# Altium PCB PCB1.PcbDoc
Units mm, origin at the board's own origin, x right, y up, seen from the top; angles counter-clockwise.
Board outline 130 x 120 mm, 2 copper layers (Top Layer, Bottom Layer); 23 components, 21 nets, 144 pads, 4 vias.
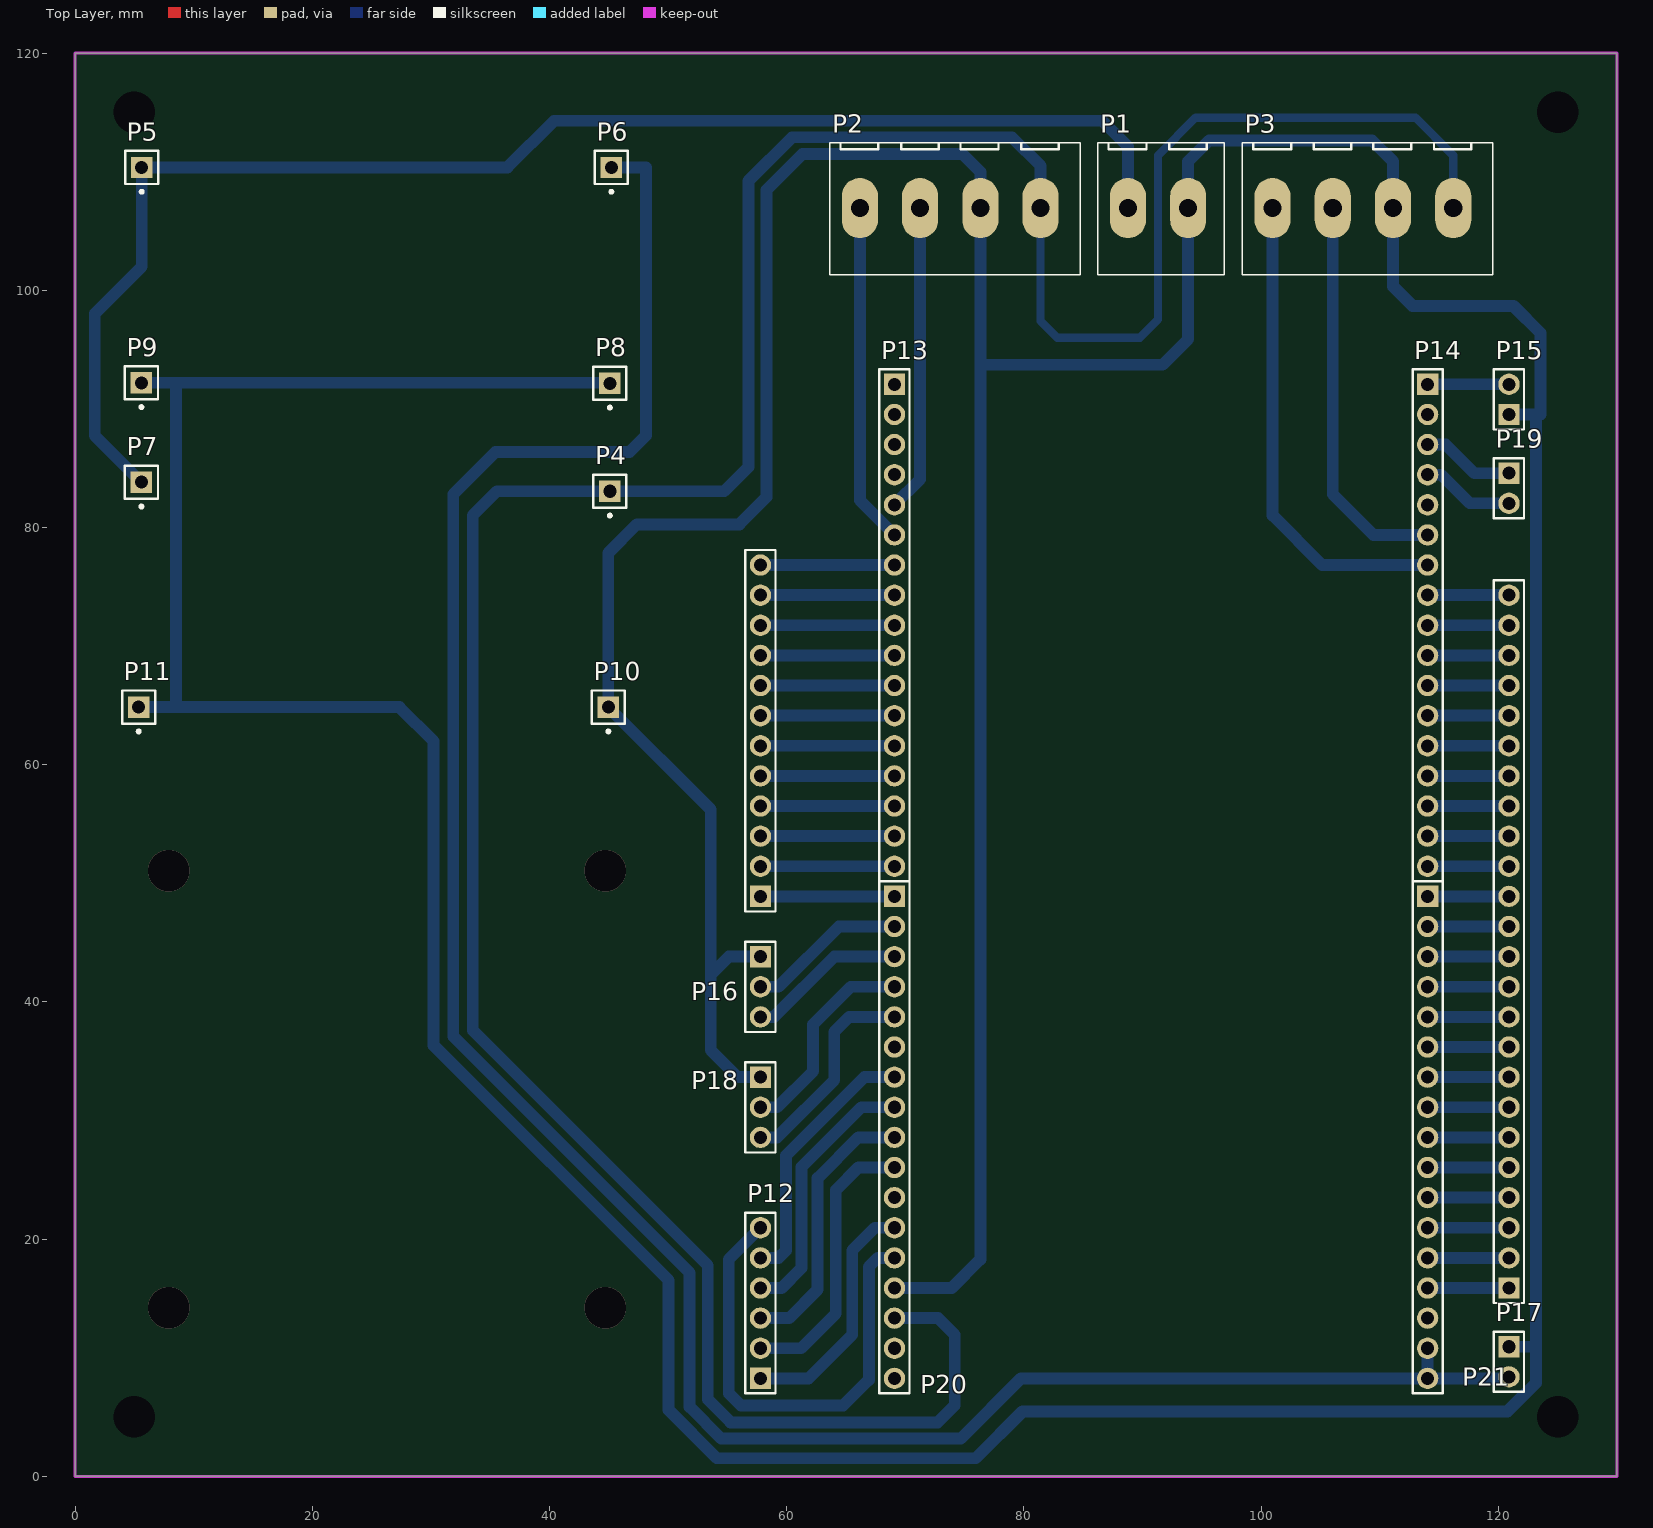
[diagram p0: Top Layer view]
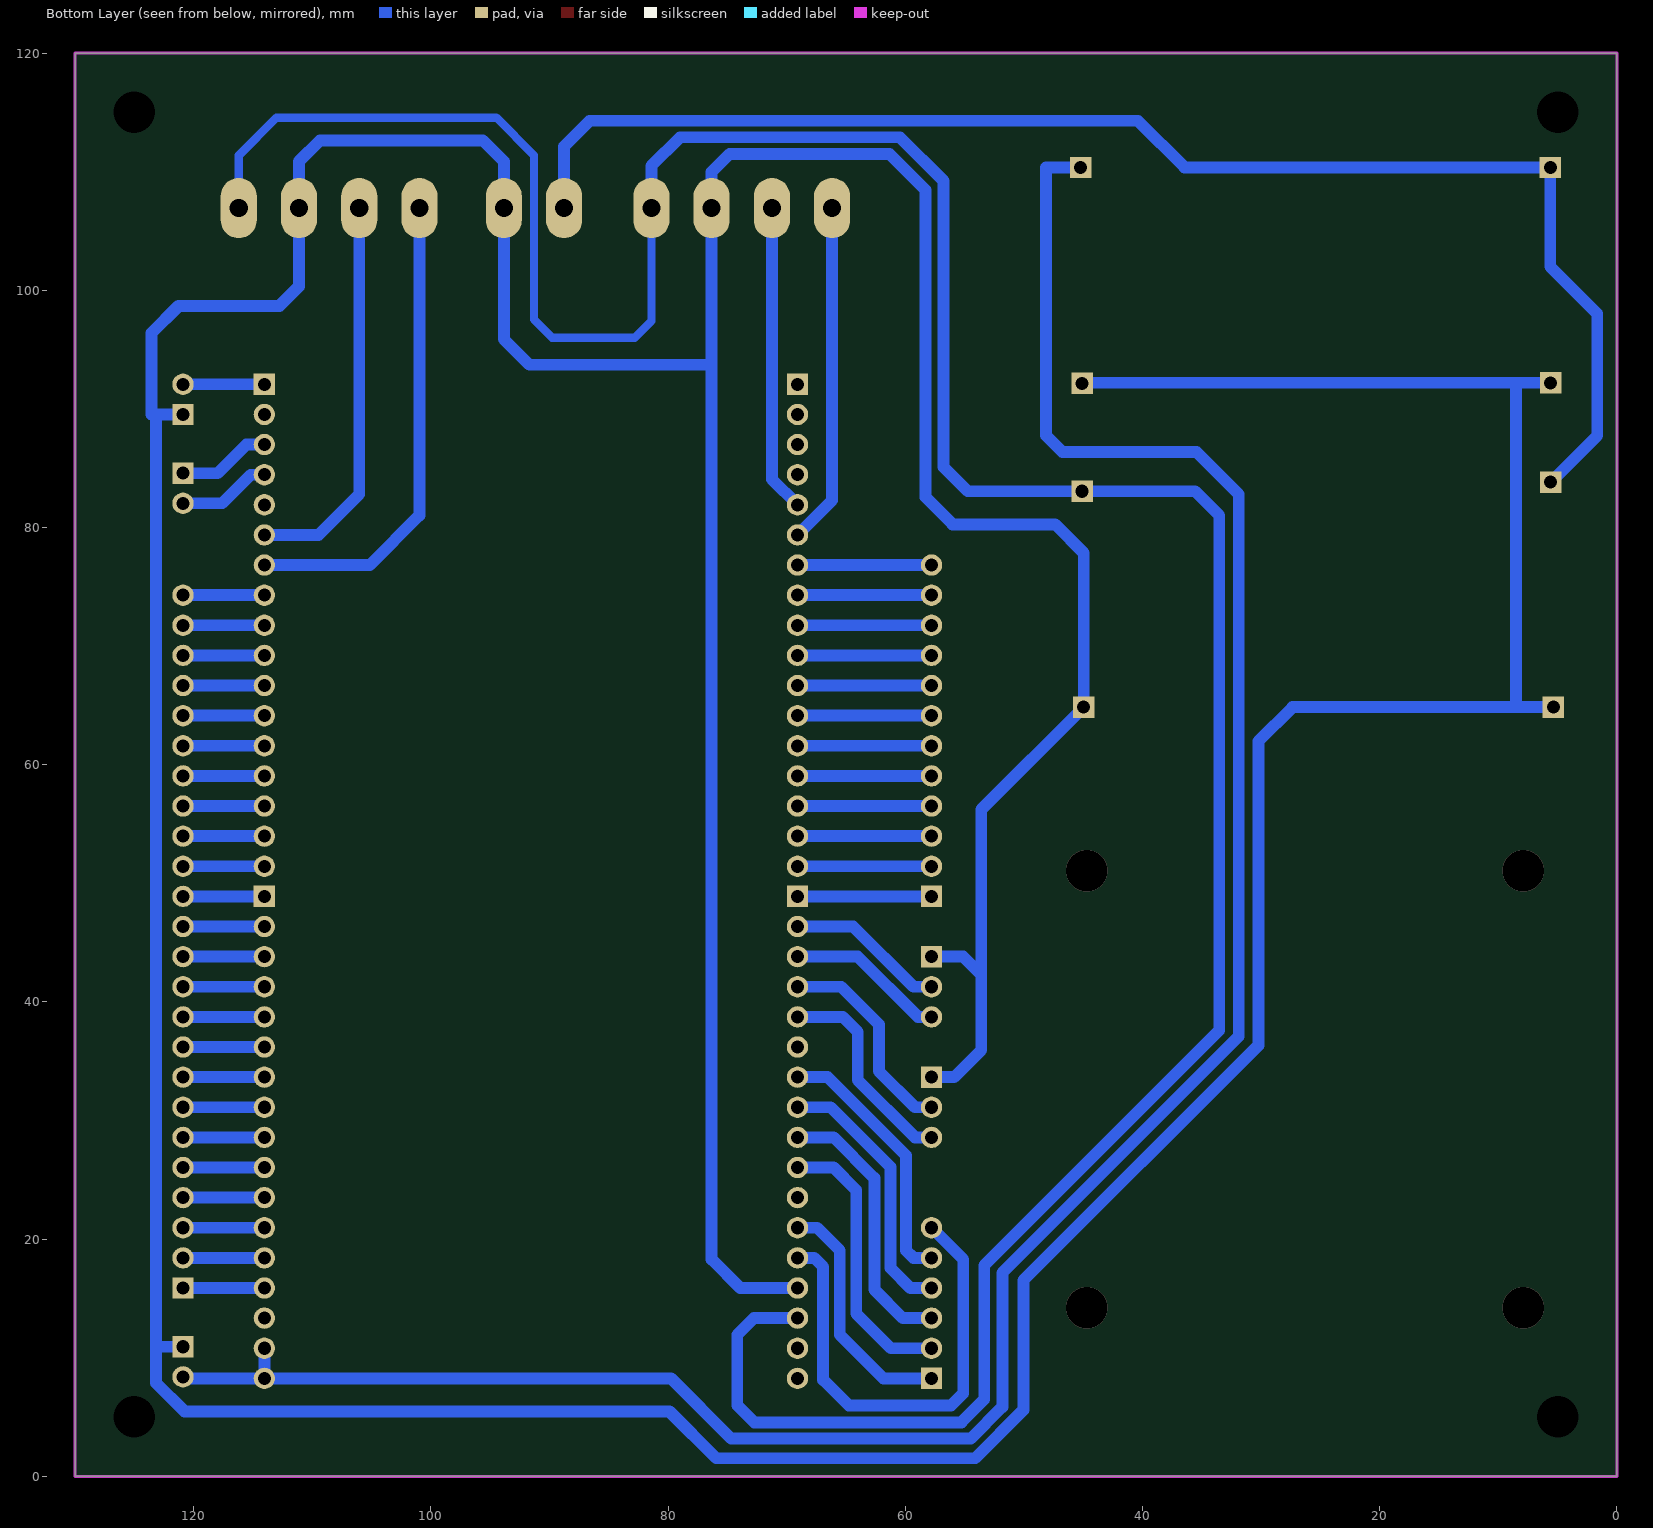
[diagram p1: Bottom Layer view, seen from below]

## Layer stack, top to bottom
Top Solder: solder mask 0.0102, Solder Resist, Dk 3.5
Top Layer: signal copper 0.0356
Dielectric 1: dielectric 0.32, FR-4, Dk 4.8
Bottom Layer: signal copper 0.0356
Bottom Solder: solder mask 0.0102, Solder Resist, Dk 3.5

## Board outline
0,0 0,120 130,120 130,0

## Design rules (kind name [scope] priority, off if disabled: settings)
Clearance [All] p1: gap=0.254 except(0.3: Track-Track)
PolygonConnect [All] p1: connectstyle=Relief reliefconductorwidth=0.254 reliefentries=4 polygonreliefangle="90 Angle" airgapwidth=0.254
RoutingVias [All] p1: holewidth=0.3 width=0.6 viastyle="Through Hole" minholewidth=0.1 minwidth=0.1 maxholewidth=1 maxwidth=2
SolderMaskExpansion [All] p1: expansion=0.102
Width [All] p1: maxlimit=2 minlimit=0.1 preferedwidth=0.8
30 further rules are at their usual default settings.

## Classes and differential pairs
component class Sheet: P1 P2 P3 P4 P5 P6 P7 P8 P9 P10 P11 P12 P13 P14 P15 P16 P17 P18 P19 P20 P21

## Components (designator, comment, footprint, x,y, rotation, side; value= is the part's Value field where it differs from the comment)
P1 "PHOENIX2" PHOENIX-MKDS2 91.313,106.934 r0 top
P2 "PHOENIX4" PHOENIX-MKDS4 73.787,106.934 r0 top
P3 "PHOENIX4" PHOENIX-MKDS4 108.585,106.934 r0 top
P4 "Plug" PIN1 45.085,83.058 r180 top
P5 "Plug" PIN1 5.612,110.363 r180 top
P6 "Plug" PIN1 45.212,110.363 r180 top
P7 "Plug" PIN1 5.588,83.82 r180 top
P8 "Plug" PIN1 45.085,92.163 r180 top
P9 "Plug" PIN1 5.588,92.202 r180 top
P10 "Plug" PIN1 44.958,64.858 r180 top
P11 "Plug" PIN1 5.358,64.858 r180 top
P12 "Driver" HDR1X6 57.785,8.255 r90 top
P13 "Header 17" HDR1X17 69.088,92.075 r270 top
P14 "Header 17" HDR1X17 114.046,92.075 r270 top
P15 "3V3" HDR1X2 120.904,89.535 r90 top
P16 "USART4" HDR1X3 57.785,43.815 r270 top
P17 "5V" HDR1X2 120.904,10.922 r270 top
P18 "USART5" HDR1X3 57.785,33.655 r270 top
P19 "I2C" HDR1X2 120.904,84.582 r270 top
P20 "Header 17" HDR1X17 69.088,48.895 r270 top
P21 "Header 17" HDR1X17 114.046,48.895 r270 top
? "Comment" HDR1X24 120.904,15.875 r90 top
? "Comment" HDR1X12 57.785,48.895 r90 top

## Footprints (in the part's own frame and the unit in brackets; to place one, negate y for a bottom-side part, rotate by r counter-clockwise, add the part's x,y. Pads: shape width x height; smd on the part's side, far side on the other; paste and mask are expansions set on the pad)
HDR1X2 [mm] "Connector; Header; 2 Position"
  rect 1.8x1.8 hole 1.1: 1(0,0)
  round 1.8 hole 1.1: 2(2.54,0)
  silkscreen extent -1.27,-1.27 3.81,1.27
HDR1X3 [mm] "Connector; Header; 3 Position"
  rect 1.8x1.8 hole 1.1: 1(0,0)
  round 1.8 hole 1.1: 2(2.54,0) 3(5.08,0)
  silkscreen extent -1.27,-1.27 6.35,1.27
HDR1X6 [mm] "Connector; Header; 6 Position"
  rect 1.8x1.8 hole 1.1: 1(0,0)
  round 1.8 hole 1.1: 2(2.54,0) 3(5.08,0) 4(7.62,0) 5(10.16,0) 6(12.7,0)
  silkscreen extent -1.27,-1.27 13.97,1.27
HDR1X12 [mm] "Connector; Header; 12 Position"
  rect 1.8x1.8 hole 1.1: 1(0,0)
  round 1.8 hole 1.1: 2(2.54,0) 3(5.08,0) 4(7.62,0) 5(10.16,0) 6(12.7,0) 7(15.24,0) 8(17.78,0) 9(20.32,0) 10(22.86,0) 11(25.4,0) 12(27.94,0)
  silkscreen extent -1.27,-1.27 29.21,1.27
HDR1X17 [mm] "Connector; Header; 17 Position"
  rect 1.8x1.8 hole 1.1: 1(0,0)
  round 1.8 hole 1.1: 2(2.54,0) 3(5.08,0) 4(7.62,0) 5(10.16,0) 6(12.7,0) 7(15.24,0) 8(17.78,0) 9(20.32,0) 10(22.86,0) 11(25.4,0) 12(27.94,0) 13(30.48,0) 14(33.02,0) 15(35.56,0) 16(38.1,0) 17(40.64,0)
  silkscreen extent -1.27,-1.27 41.91,1.27
HDR1X24 [mm] "Connector; Header; 24 Position"
  rect 1.8x1.8 hole 1.1: 1(0,0)
  round 1.8 hole 1.1: 2(2.54,0) 3(5.08,0) 4(7.62,0) 5(10.16,0) 6(12.7,0) 7(15.24,0) 8(17.78,0) 9(20.32,0) 10(22.86,0) 11(25.4,0) 12(27.94,0) 13(30.48,0) 14(33.02,0) 15(35.56,0) 16(38.1,0) 17(40.64,0) 18(43.18,0) 19(45.72,0) 20(48.26,0) 21(50.8,0) 22(53.34,0) 23(55.88,0) 24(58.42,0)
  silkscreen extent -1.27,-1.27 59.69,1.27
PHOENIX-MKDS2 [mil]
  oval 120x200 hole 60: 1(-100,0) 2(100,0)
  silkscreen extent -200,-221 220,218, body extent -200,-222 222,219, height 720
PHOENIX-MKDS4 [mil]
  oval 120x200 hole 60: 1(-300,0) 2(-100,0) 3(100,0) 4(300,0)
  silkscreen extent -400,-221 431,218, body extent -399,-205 430,181, height 559
PIN1 [mm] "Connector; Plug"
  rect 1.8x1.8 hole 1.1: 1(0,0)
  silkscreen extent -1.4,-1.4 1.4,2.17

## Part data
P12: library part "Header 6", "Header, 6-Pin"
P13 P14 P20 P21: "Header, 17-Pin"
P15 P17 P19: library part "Header 2", "Header, 2-Pin"
P16 P18: library part "Header 3", "Header, 3-Pin"
?: library part "Header 24"
?: library part "Header 12"

## Free pads (board coordinates)
  round 0 hole 3.5: 2(5,5) 2(5,115) 2(125,5) 2(125,115)

## Via types
v1: diameter 3.5, hole 3.5, Top Layer to Bottom Layer, 4 vias

## Nets (pads, with @x,y where several pads share a name; then routed paths per layer and width w, separated by ;. In a path a pad name is that pad's centre, name@x,y a point inside that pad or via, vN(x,y) a via of type N, cw(c..) or ccw(c..) an arc to the next point about the centre after c; other vN are vias at no path point)
3V3: P2.4 P3.4 P4.1 P20.15 | length 262.8
  Bottom Layer w0.7: P2.4 81.407,97.409 82.804,96.012 89.789,96.012 91.313,97.536 91.313,111.379 94.488,114.554 113.03,114.554 116.205,111.379 P3.4
  Bottom Layer w1: P20.15 72.771,13.335 74.168,11.938 74.168,5.969 72.741,4.542 55.275,4.542 53.34,6.477 53.34,17.78 33.528,37.592 33.528,81.026 35.56,83.058 P4.1 54.737,83.058 56.769,85.09 56.769,109.22 60.452,112.903 78.994,112.903 81.407,110.49 P2.4
"3V3 1": P14.1 P15.2 | length 6.9
  Bottom Layer w1: P14.1 P15.2
5V: P6.1 P17.2 P21.16 P21.17 | length 204.1
  Bottom Layer w1: P6.1 48.133,110.363 48.133,87.757 46.736,86.36 35.433,86.36 31.877,82.804 31.877,37.084 51.816,17.145 51.816,5.842 54.483,3.175 74.676,3.175 79.756,8.255 P21.17 ; P21.16@113.919,10.668 P21.16 P21.17 ; P17.2 120.777,8.255 P21.17
24V: P1.1 P5.1 P7.1 | length 120.7
  Bottom Layer w1: P7.1 1.651,87.757 1.651,98.044 5.612,102.005 P5.1 36.449,110.363 40.386,114.3 86.614,114.3 88.773,112.141 P1.1
B4: P12.5 P20.7 | length 22.3
  Bottom Layer w1: P12.5 59.309,18.415 59.944,19.05 59.944,27.051 66.548,33.655 P20.7
B5: P12.4 P20.8 | length 22.6
  Bottom Layer w1: P12.4 59.563,15.875 61.244,17.556 61.244,26.065 66.294,31.115 P20.8
B6: P12.3 P20.9 | length 23.1
  Bottom Layer w1: P12.3 60.198,13.335 62.611,15.748 62.611,25.146 66.04,28.575 P20.9
B7: P12.2 P20.10 | length 23.7
  Bottom Layer w1: P12.2 61.214,10.795 64.135,13.716 64.135,24.13 66.04,26.035 P20.10
"EN1 (B8)": P12.1 P20.12 | length 20.7
  Bottom Layer w1: P12.1 61.849,8.255 65.532,11.938 65.532,19.05 67.437,20.955 P20.12
"EN2 (B9)": P12.6 P20.13 | length 40.2
  Bottom Layer w1: P12.6 55.118,18.288 55.118,6.985 56.134,5.969 64.77,5.969 66.929,8.128 66.929,17.653 67.691,18.415 P20.13
GND: P1.2 P2.3 P3.3 P8.1 P9.1 P10.1 P11.1 P15.1 P16.1 P17.1 P18.1 P20.14 | length 621.7
  Bottom Layer w1: P11.1 8.509,64.858 ; P9.1 8.509,92.202 ; P8.1 45.046,92.202 8.509,92.202 ; P18.1 55.88,33.655 53.594,35.941 53.594,42.291 ; P16.1 55.118,43.815 53.594,42.291 ; P20.14 73.914,15.875 76.327,18.288 76.327,93.726 ; P15.1 123.19,89.535 123.19,10.922 ; P17.1@121.158,11.176 P17.1 123.19,10.922 ; 123.571,89.535 123.571,96.393 121.285,98.679 112.776,98.679 111.125,100.33 P3.3 111.125,110.871 109.347,112.649 95.631,112.649 93.853,110.871 P1.2 93.853,95.885 91.694,93.726 76.327,93.726 ; 8.509,64.858 8.509,92.202 ; 8.509,64.858 27.344,64.858 30.226,61.976 30.226,36.322 50.038,16.51 50.038,5.588 54.102,1.524 75.946,1.524 79.883,5.461 120.777,5.461 123.19,7.874 123.19,10.922 ; 53.594,42.291 53.594,56.222 P10.1 44.958,77.851 47.371,80.264 56.007,80.264 58.293,82.55 58.293,108.458 61.341,111.506 74.803,111.506 76.327,109.982 P2.3 76.327,93.726
"I2C2 SCL": P14.4 P19.2 | length 7.9
  Bottom Layer w1: P14.4 115.189,84.455 117.602,82.042 P19.2
"I2C2 SDA": P14.3 P19.1 | length 7.9
  Bottom Layer w1: P14.3 115.57,86.995 117.983,84.582 P19.1
"M1 A (B1)": P3.2 P14.6 | length 33.6
  Bottom Layer w1: P3.2 106.045,82.804 109.474,79.375 P14.6
"M1 B (B0)": P3.1 P14.7 | length 40.7
  Bottom Layer w1: P3.1 100.965,81.026 105.156,76.835 P14.7
"M2 A (C6)": P2.2 P13.5 | length 25.9
  Bottom Layer w1: P13.5 71.247,84.074 P2.2
"M2 B (C7)": P2.1 P13.6 | length 28.8
  Bottom Layer w1: P2.1 66.167,82.296 P13.6
"RX4 (C11)": P16.3 P20.3 | length 13.4
  Bottom Layer w1: P16.3 58.928,38.735 64.008,43.815 P20.3
"RX5 (D2)": P18.3 P20.5 | length 17.9
  Bottom Layer w1: P18.3 59.182,28.575 64.008,33.401 64.008,37.465 65.278,38.735 P20.5
"TX4 (C10)": P16.2 P20.2 | length 13.4
  Bottom Layer w1: P16.2 59.309,41.275 64.389,46.355 P20.2
"TX5 (C12)": P18.2 P20.4 | length 17.8
  Bottom Layer w1: P18.2 59.182,31.115 62.23,34.163 62.23,38.1 65.405,41.275 P20.4
pads on no net: ?.1 ?.2 ?.3 ?.4 ?.5 ?.6 ?.7 ?.8 ?.9 ?.10 ?.11 ?.12 ?.13 ?.14 ?.15 ?.16 ?.17 ?.18 ?.19 ?.20 ?.21 ?.22 ?.23 ?.24 P13.1 P13.2 P13.3 P13.4 P13.7 P13.8 P13.9 P13.10 P13.11 P13.12 P13.13 P13.14 P13.15 P13.16 P13.17 P14.2 P14.5 P14.8 P14.9 P14.10 P14.11 P14.12 P14.13 P14.14 P14.15 P14.16 P14.17 P20.1 P20.6 P20.11 P20.16 P20.17 P21.1 P21.2 P21.3 P21.4 P21.5 P21.6 P21.7 P21.8 P21.9 P21.10 P21.11 P21.12 P21.13 P21.14 P21.15
copper on no net: | length 300.4
  Bottom Layer w1: 57.785,48.895 69.088,48.895 ; 57.785,51.435 69.088,51.435 ; 57.785,53.975 69.088,53.975 ; 57.785,56.515 69.088,56.515 ; 57.785,59.055 69.088,59.055 ; 57.785,61.595 69.088,61.595 ; 57.785,64.135 69.088,64.135 ; 57.785,66.675 69.088,66.675 ; 57.785,69.215 69.088,69.215 ; 57.785,71.755 69.088,71.755 ; 57.785,74.295 69.088,74.295 ; 57.785,76.835 69.215,76.835 ; 114.046,15.875 120.904,15.875 ; 114.046,18.415 120.904,18.415 ; 114.046,20.955 120.904,20.955 ; 114.046,23.495 120.904,23.495 ; 114.046,26.035 120.904,26.035 ; 114.046,28.575 120.904,28.575 ; 114.046,31.115 120.904,31.115 ; 114.046,33.655 120.904,33.655 ; 114.046,36.195 120.904,36.195 ; 114.046,38.735 120.904,38.735 ; 114.046,41.275 120.904,41.275 ; 114.046,43.815 120.904,43.815 ; 114.046,46.355 120.904,46.355 ; 114.046,48.895 120.904,48.895 ; 114.046,51.435 120.904,51.435 ; 114.046,53.975 120.904,53.975 ; 114.046,56.515 120.904,56.515 ; 114.046,59.055 120.904,59.055 ; 114.046,61.595 120.904,61.595 ; 114.046,64.135 120.904,64.135 ; 114.046,66.675 120.904,66.675 ; 114.046,69.215 120.904,69.215 ; 114.046,74.295 120.904,74.295 ; 114.173,71.755 121.031,71.755
  other v1: 7.874,14.224 44.704,14.224 7.874,51.054 44.704,51.054

## Keep-outs
Keep-Out Layer:
  the board outline again, w0.254